# EAGLE board PowerboardRev4Con (EAGLE 8.6.0)
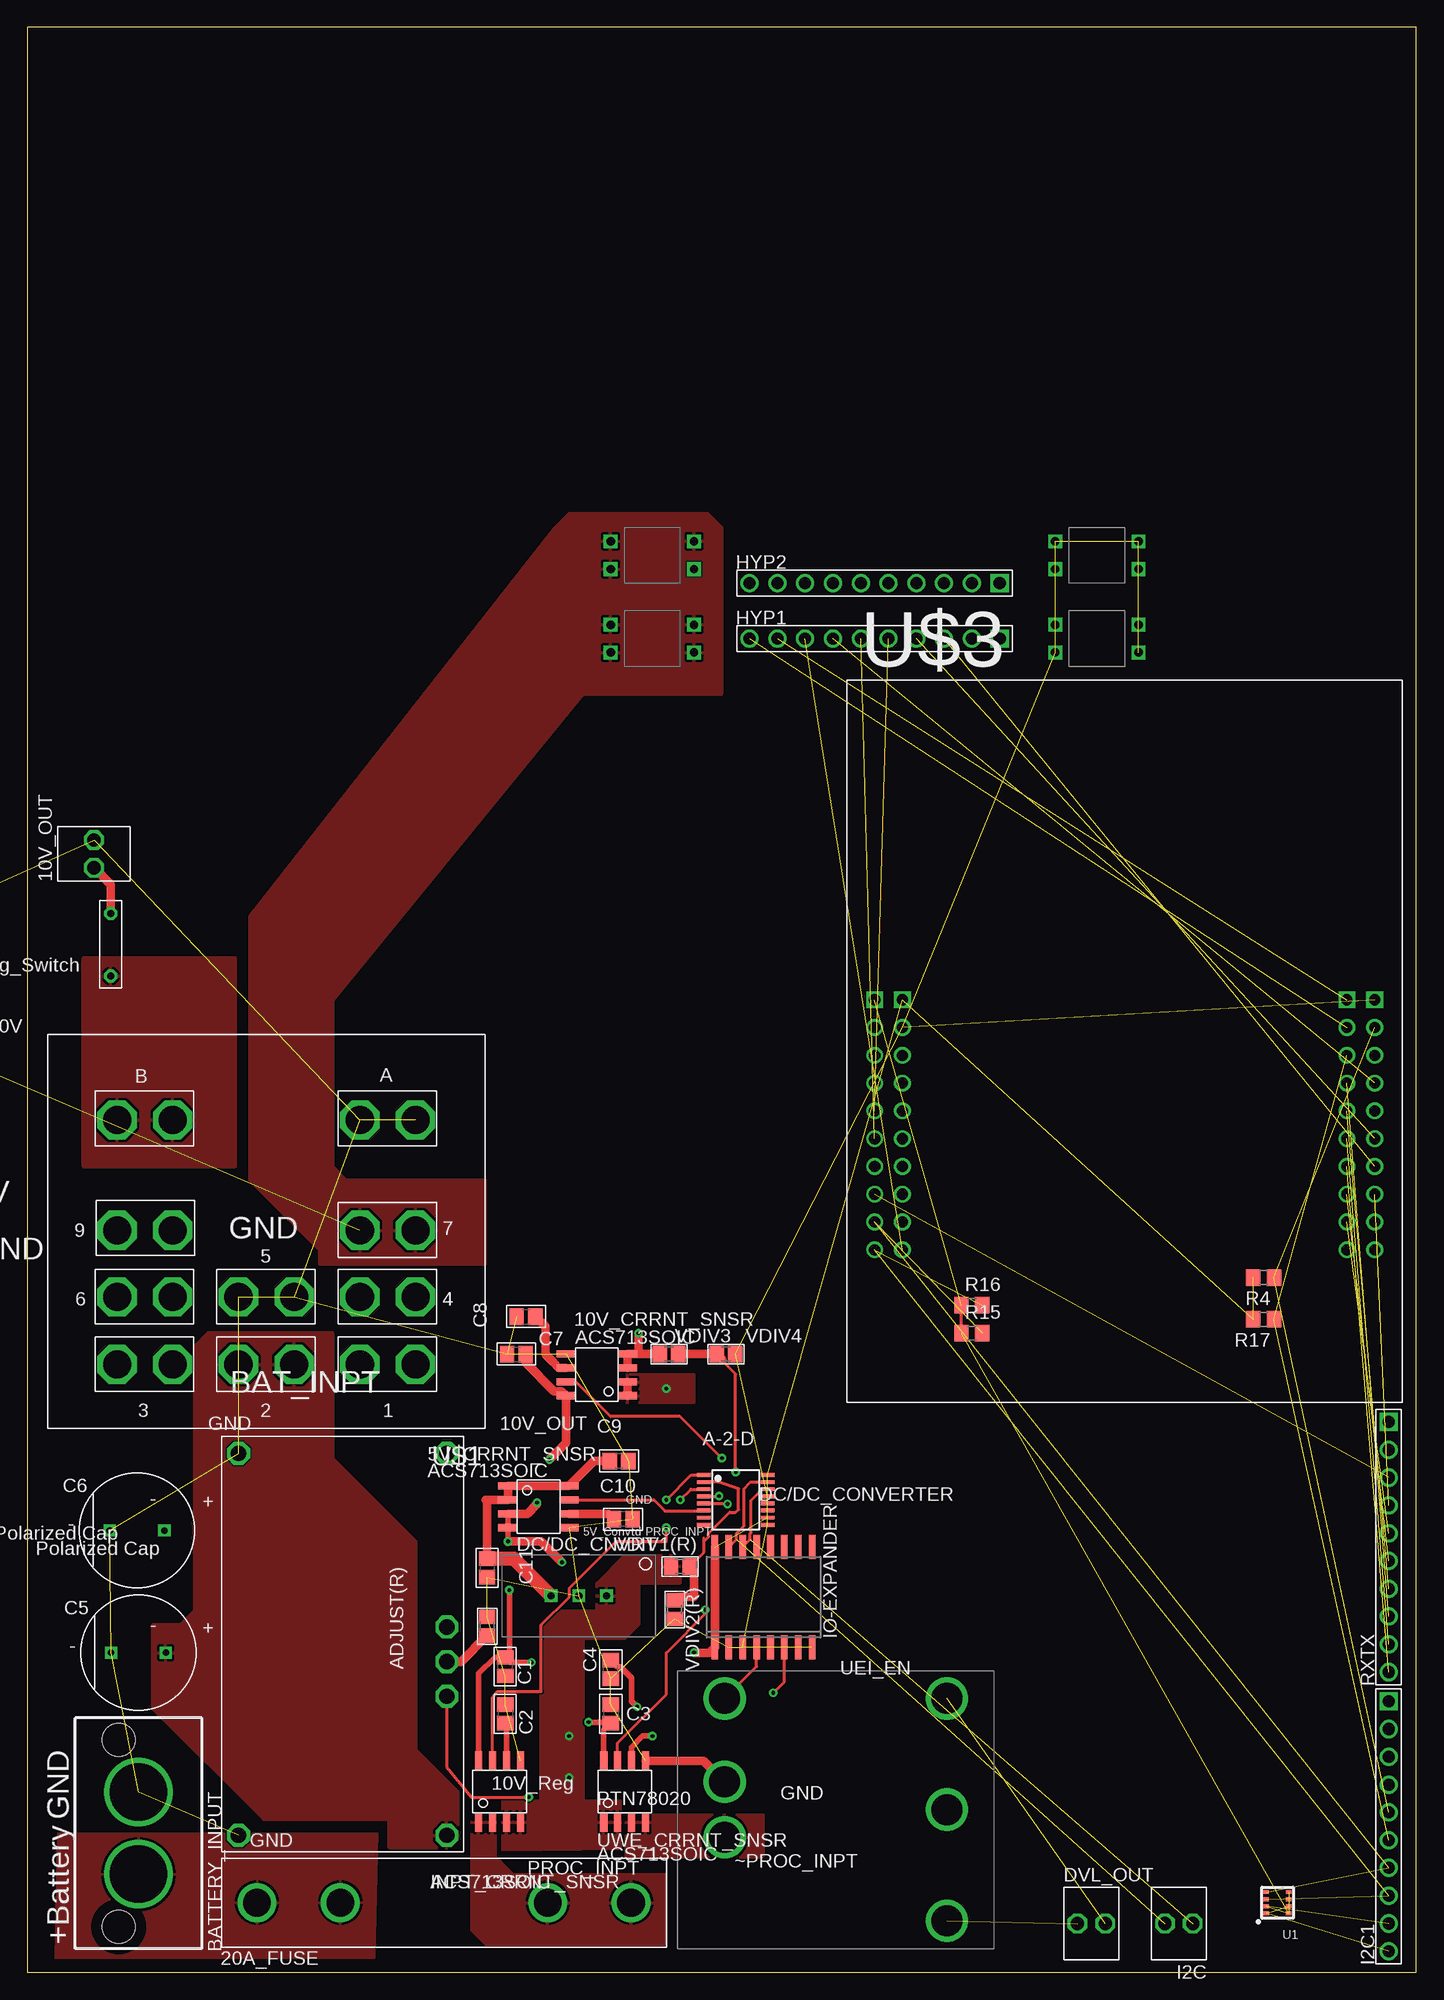
[diagram p0: board, top side]
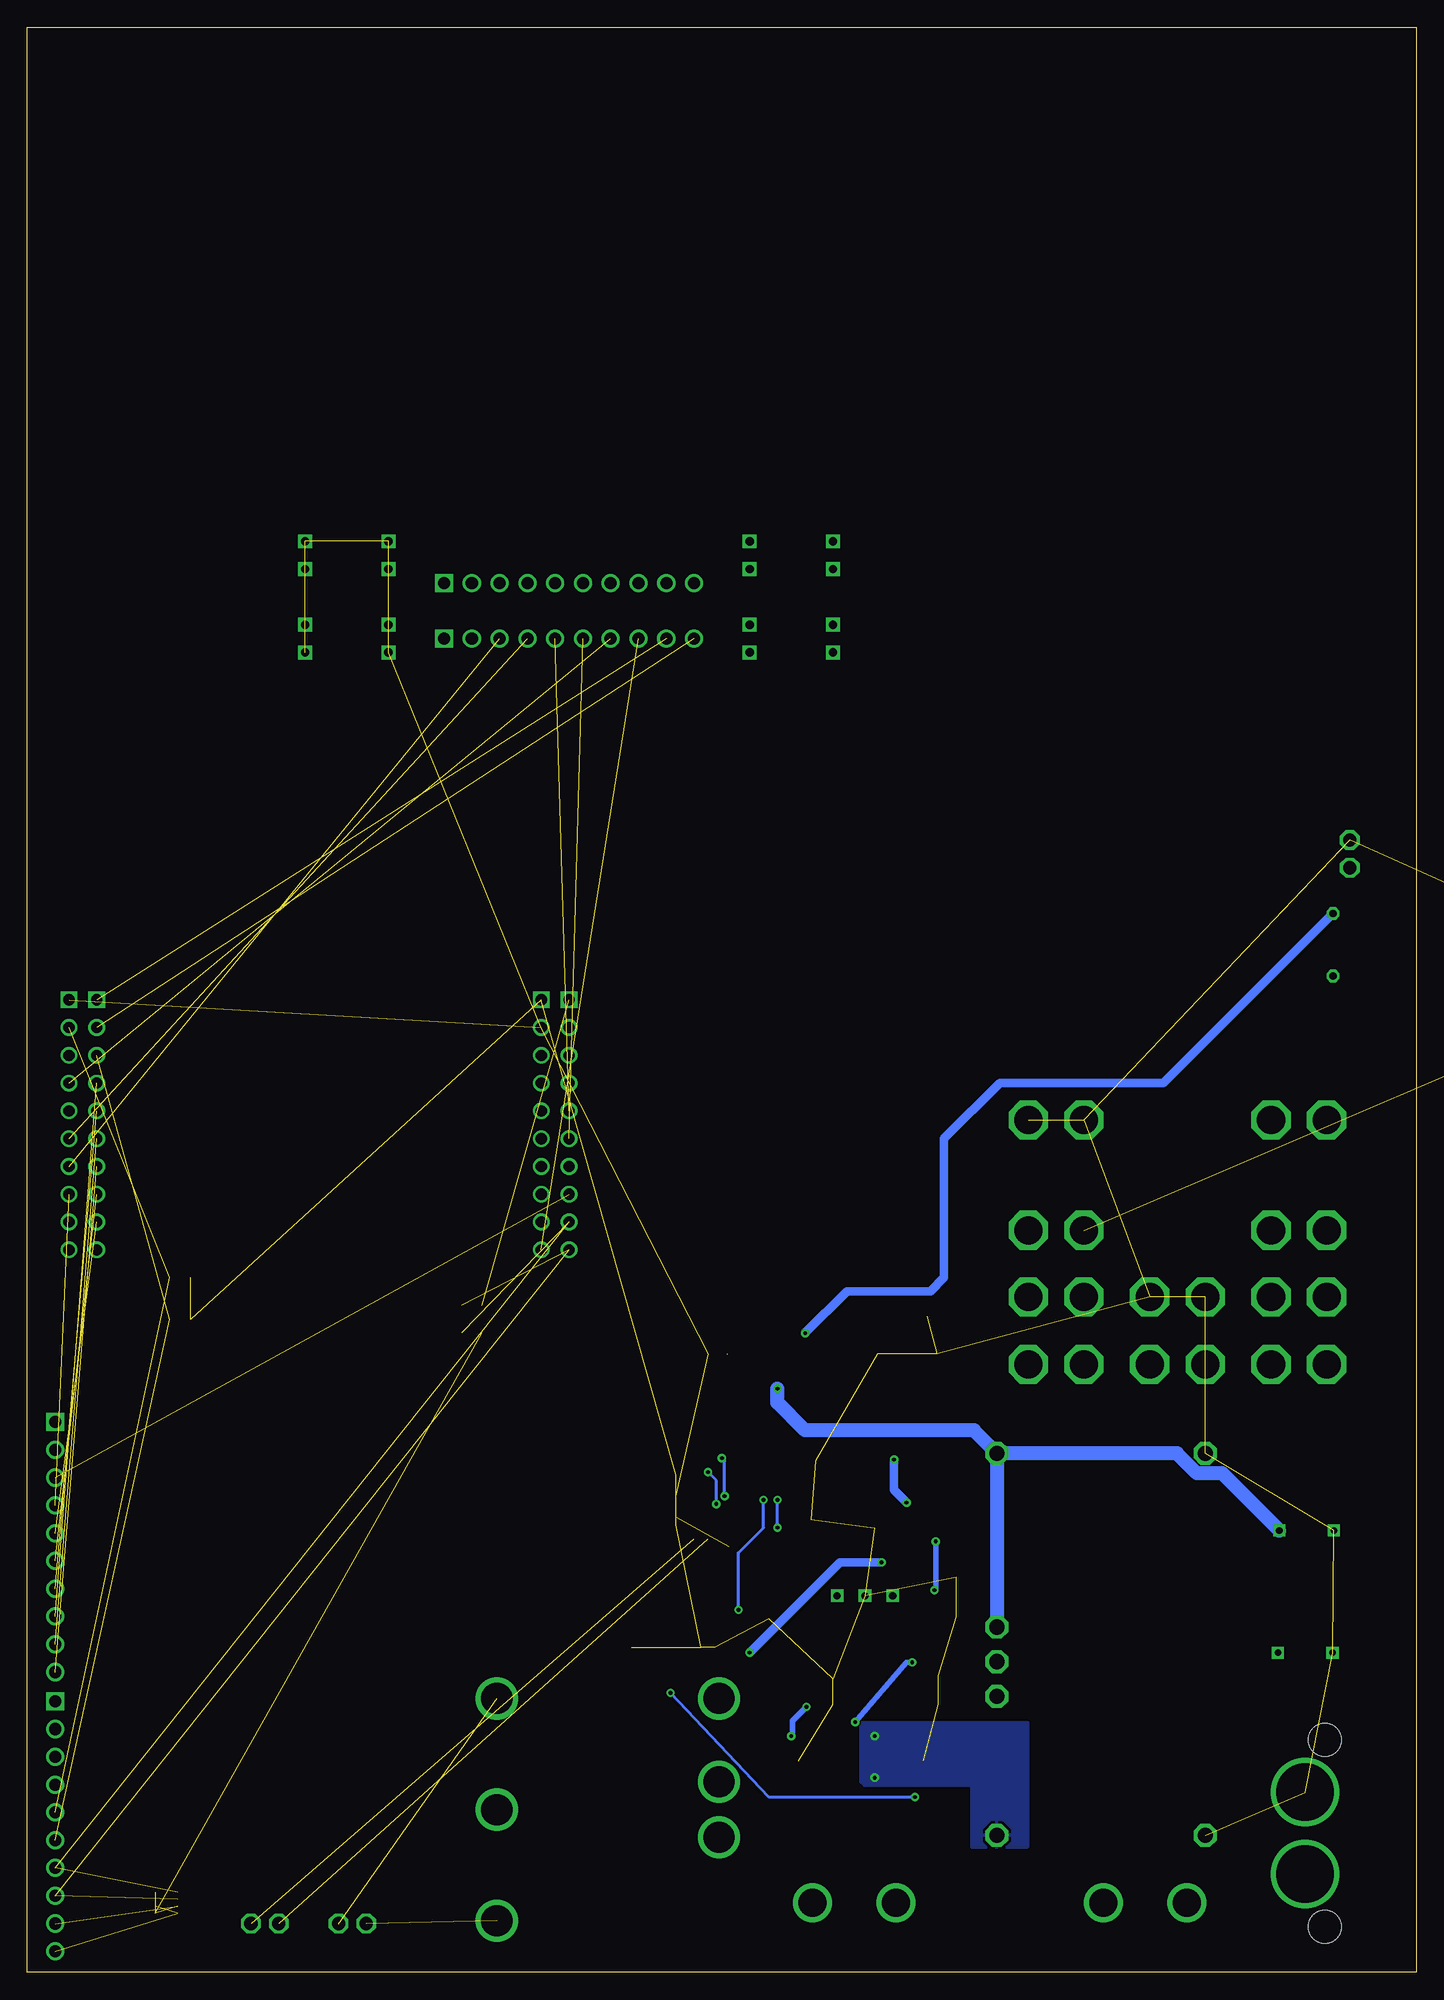
[diagram p1: board, bottom side, seen from below]

Size 127 x 177.8 mm. Coordinates in mm from the lower left corner, seen from the top.
Outline: 0,0 127,0 127,177.8 0,177.8 0,0
Copper layers (1*16): Top 0.035mm / dielectric 1.5mm / Bottom 0.035mm
Design rules "default": minimum track width 6mil, minimum drill 0.35mm, track to track 6mil, track to pad 6mil, pad to pad 6mil, via to via 6mil, smd to smd 6mil, copper to edge 40mil, drill to drill 6mil, minimum pad ring 10mil, minimum via ring 8mil, stop-mask expansion 4mil, vias tented up to drill 0mil, thermal gap 10mil

## Footprints (pad centres in the part's own frame; a part is rotated, then mirrored left to right if it is on the bottom)
ACS713-SOIC = smd 0.65 x 1.75: P$1 -1.905,-2.8; P$2 -0.635,-2.8; P$3 0.635,-2.8; P$4 1.905,-2.8; P$5 1.905,2.8; P$6 0.635,2.8; P$7 -0.635,2.8; P$8 -1.905,2.8
KK254_VERT_2PIN = drill 1.2 octagon: P$1 1.27,0; P$2 -1.27,0
PTN = drill 1.397 octagon: ADJUST -1.587,-9.525; GND1 -17.462,9.525; GND2 17.462,9.525; INHIBIT -4.763,-9.525; SENSE 1.587,-9.525; VIN -17.462,-9.525; VOUT 17.462,-9.525
1.25"_FUSECLIPS = drill 2.54: P$1 -17.107,0; P$2 -9.487,0; P$3 9.487,0; P$4 17.107,0
TSSOP16 = smd 0.35 x 1.2: 1 -2.275,-2.925; 2 -1.625,-2.925; 3 -0.975,-2.925; 4 -0.325,-2.925; 5 0.325,-2.925; 6 0.975,-2.925; 7 1.625,-2.925; 8 2.275,-2.925; 9 2.275,2.925; 10 1.625,2.925; 11 0.975,2.925; 12 0.325,2.925; 13 -0.325,2.925; 14 -0.975,2.925; 15 -1.625,2.925; 16 -2.275,2.925
R0805 = smd 1.3 x 1.5: 1 -0.85,0; 2 0.85,0
SUPERSABRE_2CIRCUIT = drill 5.25: P$1 -3.747,0; P$2 3.747,0 | hole 2.997: -8.534,-1.803; 8.534,-1.803
C0805 = smd 1.3 x 1.5: 1 -0.85,0; 2 0.85,0
PANASONIC_A_TYPE_M = drill 0.6 square: + 2.5,0; - -2.5,0
TSR2 = drill 0.65 square: 1 -2.54,0; 2 0,0; 3 2.54,0
UEI15 = drill 2.845: +VIN 10.16,2.54; +VOUT -10.16,10.16; -VIN 10.16,-2.54; -VOUT -10.16,-10.16; ON/OFFCNTRL 10.16,-10.16; OTPTTRIM -10.16,0
KK254_10-PIN = drill 1.1 square: P$1 11.43,0 | drill 1.1: P$2 8.89,0; P$3 6.35,0; P$4 3.81,0; P$5 1.27,0; P$6 -1.27,0; P$7 -3.81,0; P$8 -6.35,0; P$9 -8.89,0; P$10 -11.43,0
SO16W = smd 0.6 x 2.2: 1 -4.445,-4.6; 2 -3.175,-4.6; 3 -1.905,-4.6; 4 -0.635,-4.6; 5 0.635,-4.6; 6 1.905,-4.6; 7 3.175,-4.6; 8 4.445,-4.6; 9 4.445,4.6; 10 3.175,4.6; 11 1.905,4.6; 12 0.635,4.6; 13 -0.635,4.6; 14 -1.905,4.6; 15 -3.175,4.6; 16 -4.445,4.6
HE151TR-ND = drill 0.65 octagon: P$1 -2.81,0; P$2 2.905,0
R0805' = smd 1.3 x 1.5: 1 -0.95,0; 2 0.95,0
BME280_LGA = smd 0.5 x 0.35: P$1 1.025,0.975; P$2 1.025,0.325; P$3 1.025,-0.325; P$4 1.025,-0.975; P$5 -1.025,-0.975; P$6 -1.025,-0.325; P$7 -1.025,0.325; P$8 -1.025,0.975
KUHP_6.35MM-QUICK-CONNECT = drill 2.57 octagon: 1A -13.64,6.17; 1B -8.56,6.17; 2A -2.54,6.17; 2B 2.54,6.17; 3A 8.56,6.17; 3B 13.64,6.17; 4A -13.64,0; 4B -8.56,0; 5A -2.54,0; 5B 2.54,0; 6A 8.56,0; 6B 13.64,0; 7A -13.64,-6.1; 7B -8.56,-6.1; 9A 8.56,-6.1; 9B 13.64,-6.1; AA -13.64,-16.18; AB -8.56,-16.18; BA 8.56,-16.18; BB 13.64,-16.18
4-PIN-BIGPOWER = drill 0.762 square: P$1 -1.27,3.81; P$2 1.27,3.81; P$3 1.27,-3.81; P$4 -1.27,-3.81
TIVA-C_EVAL = drill 1.016 square: 1-1 -22.86,3.81; 2-1 22.86,3.81; 3-1 -20.32,3.81; 4-1 20.32,3.81 | drill 1.016: 1-2 -22.86,1.27; 1-3 -22.86,-1.27; 1-4 -22.86,-3.81; 1-5 -22.86,-6.35; 1-6 -22.86,-8.89; 1-7 -22.86,-11.43; 1-8 -22.86,-13.97; 1-9 -22.86,-16.51; 1-10 -22.86,-19.05; 2-2 22.86,1.27; 2-3 22.86,-1.27; 2-4 22.86,-3.81; 2-5 22.86,-6.35; 2-6 22.86,-8.89; 2-7 22.86,-11.43; 2-8 22.86,-13.97; 2-9 22.86,-16.51; 2-10 22.86,-19.05; 3-2 -20.32,1.27; 3-3 -20.32,-1.27; 3-4 -20.32,-3.81; 3-5 -20.32,-6.35; 3-6 -20.32,-8.89; 3-7 -20.32,-11.43; 3-8 -20.32,-13.97; 3-9 -20.32,-16.51; 3-10 -20.32,-19.05; 4-2 20.32,1.27; 4-3 20.32,-1.27; 4-4 20.32,-3.81; 4-5 20.32,-6.35; 4-6 20.32,-8.89; 4-7 20.32,-11.43; 4-8 20.32,-13.97; 4-9 20.32,-16.51; 4-10 20.32,-19.05

## Placement (x,y rotation side)
5V_CRRNT_SNSR  ACS713SOIC  [ACS713-SOIC]  46.74,42.55 270 top
10V_CRRNT_SNSR  ACS713SOIC  [ACS713-SOIC]  52.07,54.61 90 top
10V_OUT  KK254_VERT_2PIN""  [KK254_VERT_2PIN]  6.1,102.23 90 top
10V_REGULATOR  PTN78020  [PTN]  28.83,29.97 90 top
20A_FUSE  [1.25"_FUSECLIPS]  38.1,6.35 0 top
A-2-D  ADS7828  [TSSOP16]  64.77,43.18 270 top
ADJUST(R)  2.66k  [R0805]  42.04,31.62 90 top
BATTERY_INPUT  2_SUPERSABRE  [SUPERSABRE_2CIRCUIT]  10.16,12.7 270 top
BATTERY_OUT  2_SUPERSABRE  [SUPERSABRE_2CIRCUIT]  -22.86,92.2 180 top  (outside the outline)
C1  0.1u  [C0805]  43.69,27.94 90 top
C2  47n  [C0805]  43.69,23.62 270 top
C3  0.1u  [C0805]  53.34,23.62 270 top
C4  47n  [C0805]  53.34,27.69 90 top
C5  [PANASONIC_A_TYPE_M]  10.16,29.21 0 top
C6  [PANASONIC_A_TYPE_M]  10.03,40.39 0 top
C7  0.1u  [C0805]  44.7,56.52 0 top
C8  47n  [C0805]  45.59,59.94 0 top
C9  0.1u  [C0805]  54.1,46.74 180 top
C10  47n  [C0805]  54.48,41.4 180 top
C11  FILTER  [C0805]  42.04,36.96 270 top
DC/DC_CNVRT  TSR2-2450  [TSR2]  50.42,34.42 180 top
DC/DC_CONVERTER  UEI15  [UEI15]  73.91,14.86 180 top
DVL_OUT  KK254_VERT_2PIN""  [KK254_VERT_2PIN]  97.28,4.45 0 top
HYP1  KK254_10-PIN  [KK254_10-PIN]  77.47,121.92 0 top
HYP2  KK254_10-PIN  [KK254_10-PIN]  77.47,127 0 top
I2C  KK254_VERT_2PIN""  [KK254_VERT_2PIN]  105.28,4.45 180 top
I2C1  KK254_10-PIN  [KK254_10-PIN]  124.46,13.34 90 top
INPT_CRRNT_SNSR  ACS713SOIC  [ACS713-SOIC]  43.18,16.51 0 top
IO-EXPANDER  PCF8574T  [SO16W]  67.31,34.29 0 top
MAGREAD  HE151TR-ND  [HE151TR-ND]  7.62,93.98 270 top
R4  5k  [R0805']  113.03,63.5 180 top
R15  5k  [R0805']  86.36,58.42 0 top
R16  5k  [R0805']  86.36,60.96 0 top
R17  5k  [R0805']  113.03,59.69 180 top
RXTX  KK254_10-PIN  [KK254_10-PIN]  124.46,38.86 90 top
U1  BME280  [BME280_LGA]  114.3,6.35 180 top
U$1  KUHP-5XX1-XX  [KUHP_6.35MM-QUICK-CONNECT]  21.84,61.72 180 top
U$2  BCS-106-L-D-PE-BE  [4-PIN-BIGPOWER]  97.79,121.92 90 top
U$3  TIVA-C_EVAL  [TIVA-C_EVAL]  100.33,85.09 0 top
U$4  BCS-106-L-D-PE-BE  [4-PIN-BIGPOWER]  57.15,121.92 90 top
U$5  BCS-106-L-D-PE-BE  [4-PIN-BIGPOWER]  57.15,129.54 90 top
U$6  BCS-106-L-D-PE-BE  [4-PIN-BIGPOWER]  97.79,129.54 90 top
UWE_CRRNT_SNSR  ACS713SOIC  [ACS713-SOIC]  54.61,16.51 0 top
VDIV1(R)  90kO  [R0805]  59.69,37.08 0 top
VDIV2(R)  10kO  [R0805]  59.18,33.15 270 top
VDIV3  90kO  [R0805]  58.67,56.52 0 top
VDIV4  10kO  [R0805]  63.88,56.52 0 top

## Library data of the parts
5V_CRRNT_SNSR 10V_CRRNT_SNSR INPT_CRRNT_SNSR UWE_CRRNT_SNSR = allegro
10V_OUT BATTERY_INPUT BATTERY_OUT DVL_OUT HYP1 HYP2 I2C I2C1 RXTX = molex
10V_REGULATOR A-2-D U$3 = texas
20A_FUSE = littelfuse
ADJUST(R) C1-C11 R4 R15-R17 VDIV1(R) VDIV2(R) VDIV3 VDIV4 = resistor
DC/DC_CNVRT = tracoPower
DC/DC_CONVERTER = murata
IO-EXPANDER = texas; MPN: PCF8574T/3,512; OC_FARNELL: 1201255; OC_NEWARK: 70R6870
MAGREAD = magReed
U1 = BME280ComponentLibrary; PROD_ID: IC-13090
U$1 = TE
U$2 U$4-U$6 = samtec

## Nets
3.3V: I2C1.P$9 R15.1 R16.1 U1.P$2 U1.P$5 U1.P$6 U1.P$8 U$3.1-1
5V: 5V_CRRNT_SNSR.P$3 5V_CRRNT_SNSR.P$4 10V_CRRNT_SNSR.P$8 A-2-D.10 A-2-D.16 C1.2 C3.2 C7.2 INPT_CRRNT_SNSR.P$8 IO-EXPANDER.1 IO-EXPANDER.16 R4.2 R17.2 U$3.3-1 UWE_CRRNT_SNSR.P$8
5V_CNVTD: 5V_CRRNT_SNSR.P$1 5V_CRRNT_SNSR.P$2 5V_CRRNT_SNSR.P$8 C9.2 C11.1 DC/DC_CNVRT.3
5V_CURRENT: 5V_CRRNT_SNSR.P$7 A-2-D.6
5V_FILT: 5V_CRRNT_SNSR.P$6 C10.2
10V_CURRENT: 10V_CRRNT_SNSR.P$7 A-2-D.4
10V_EN: 10V_REGULATOR.INHIBIT IO-EXPANDER.6
10V_OUT: 10V_CRRNT_SNSR.P$1 10V_CRRNT_SNSR.P$2 10V_REGULATOR.SENSE 10V_REGULATOR.VOUT C6.+
10V_VOLTAGE: A-2-D.5 VDIV3.2 VDIV4.1
+VIN: DC/DC_CONVERTER.+VIN UWE_CRRNT_SNSR.P$3 UWE_CRRNT_SNSR.P$4
BATTERY_LINE: BATTERY_OUT.P$2 U$1.7A U$1.7B U$4.P$1 U$4.P$2 U$4.P$3 U$4.P$4 U$5.P$1 U$5.P$2 U$5.P$3
CS_0: U$3.2-9
CS_2: U$3.1-2
DGND: I2C1.P$10 U1.P$1 U1.P$7
FILTER: C4.2 UWE_CRRNT_SNSR.P$6
FLTR_10V: 10V_CRRNT_SNSR.P$6 C8.2
GND: 5V_CRRNT_SNSR.P$5 10V_CRRNT_SNSR.P$5 10V_OUT.P$1 10V_REGULATOR.GND1 10V_REGULATOR.GND2 A-2-D.9 A-2-D.12 A-2-D.13 ADJUST(R).2 BATTERY_INPUT.P$1 BATTERY_OUT.P$1 C1.1 C2.1 C3.1 C4.1 C5.- C6.- C7.1 C8.1 C9.1 C10.1 C11.2 DC/DC_CNVRT.2 DC/DC_CONVERTER.-VIN INPT_CRRNT_SNSR.P$5 IO-EXPANDER.2 IO-EXPANDER.3 IO-EXPANDER.8 U$1.5A U$1.5B U$1.AA U$1.AB U$2.P$1 U$2.P$2 U$2.P$3 U$2.P$4 U$3.2-1 U$3.3-2 U$6.P$1 U$6.P$2 U$6.P$3 U$6.P$4 UWE_CRRNT_SNSR.P$5 VDIV2(R).2 VDIV4.2
INPT_FILT: C2.2 INPT_CRRNT_SNSR.P$6
INPUT_CURRENT: A-2-D.1 INPT_CRRNT_SNSR.P$7
INPUT_VOLTAGE: A-2-D.2 VDIV1(R).2 VDIV2(R).1
MISO_0: RXTX.P$4 U$3.2-8
MISO_3: U$3.3-5
MOSI_0: RXTX.P$3 U$3.1-8
MOSI_3: U$3.3-6
N$5: 10V_REGULATOR.ADJUST ADJUST(R).1
PE2: U$3.3-8
PE3: U$3.3-9
PROC_INPUT: 10V_REGULATOR.VIN C5.+ DC/DC_CNVRT.1 INPT_CRRNT_SNSR.P$3 INPT_CRRNT_SNSR.P$4 U$1.2A U$1.2B UWE_CRRNT_SNSR.P$1 UWE_CRRNT_SNSR.P$2 VDIV1(R).1
PROCESSED_10V_OUT: 10V_CRRNT_SNSR.P$3 10V_CRRNT_SNSR.P$4 10V_OUT.P$2 MAGREAD.P$1 VDIV3.1
PROCESSED_UEI_OUTPUT: DC/DC_CONVERTER.+VOUT DVL_OUT.P$2
PUSH1: U$3.4-10
PWM0: HYP1.P$3 U$3.2-7
PWM1: HYP1.P$4 U$3.2-6
PWM2: HYP1.P$5 U$3.1-5
PWM3: HYP1.P$6 U$3.1-6
PWM4: HYP1.P$7 U$3.2-4
PWM5: HYP1.P$8 U$3.3-10
PWM6: HYP1.P$9 U$3.4-1
PWM7: HYP1.P$10 U$3.4-2
RES: U$3.2-5
RLY_10V: MAGREAD.P$2 U$1.BA U$1.BB
RX_CF: U$3.2-3
RX_MC: RXTX.P$8 U$3.4-4
RX_MD: RXTX.P$6 U$3.4-8
RX_MF: U$3.1-3
RX_SF: RXTX.P$9 U$3.4-6
SCK_0: U$3.2-10
SCL: A-2-D.14 I2C.P$2 IO-EXPANDER.14
SCL_0: I2C1.P$5 R4.1 U$3.2-2
SCL_1: I2C1.P$7 R15.2 U1.P$4 U$3.1-9
SDA: A-2-D.15 I2C.P$1 IO-EXPANDER.15
SDA_0: I2C1.P$6 R17.1 U$3.4-3
SDA_1: I2C1.P$8 R16.2 U1.P$3 U$3.1-10
SPI_CLK_2: U$3.1-7
TX_CF: U$3.3-7
TX_MC: RXTX.P$7 U$3.4-5
TX_MD: RXTX.P$5 U$3.4-9
TX_MF: U$3.1-4
TX_SF: RXTX.P$10 U$3.4-7
UEI_EN: DC/DC_CONVERTER.ON/OFFCNTRL IO-EXPANDER.4
UEI_GND: DC/DC_CONVERTER.-VOUT DVL_OUT.P$1
UWE_CURRENT: A-2-D.3 UWE_CRRNT_SNSR.P$7
VBAT: 20A_FUSE.P$1 20A_FUSE.P$2 BATTERY_INPUT.P$2
VBAT_P: 20A_FUSE.P$3 20A_FUSE.P$4 INPT_CRRNT_SNSR.P$1 INPT_CRRNT_SNSR.P$2

## Tracks (layer width: path | path; a pad name or v marks a point on that pad's centre or on a via)
3.3V  (6 unrouted)
  Top 0.254: R15.1 R16.1
5V  (via drill 0.35)  (5 unrouted)
  Top 0.508: UWE_CRRNT_SNSR.P$8 52.7,22.14 C3.2 53.25,22.86 v51.31,22.86 | INPT_CRRNT_SNSR.P$8 41.27,27.3 42.76,28.79 C1.2 | 5V_CRRNT_SNSR.P$3 5V_CRRNT_SNSR.P$4 v43.94,39.38 v43.94,39.37 | v44.07,34.92 44.07,29.17 C1.2 | v46.1,28.32 44.16,28.32 C1.2
  Top 0.762: v43.94,39.37 46.99,39.37 v48.9,37.47 | v60.96,29.21 62.38,29.21 IO-EXPANDER.1 62.87,32.72 62.89,32.75 62.89,38.37 62.87,38.4 IO-EXPANDER.16 | 5V_CRRNT_SNSR.P$3 45.72,41.91 46.61,42.8 v46.61,42.93 | v47.75,46.86 49.27,48.38 10V_CRRNT_SNSR.P$8 48.86,53.12 48.17,53.12 45.55,55.74 C7.2
  Bottom 0.508: v43.94,39.37 43.94,35.05 v44.07,34.92 | v51.31,22.86 46.61,28.32 v46.1,28.32
  Bottom 0.762: v48.9,37.47 52.7,37.47 v60.96,29.21 | v46.61,42.93 47.75,44.07 v47.75,46.86
5V_CNVTD
  Top 0.762: C11.1 42.04,43.05 41.91,43.18 5V_CRRNT_SNSR.P$2 5V_CRRNT_SNSR.P$1 5V_CRRNT_SNSR.P$8 51.82,46.74 C9.2
  Top 1.27: DC/DC_CNVRT.3 44.49,37.81 C11.1
5V_CURRENT
  Top 0.254: 5V_CRRNT_SNSR.P$7 57.28,43.18 58.29,42.16 61.8,42.16 A-2-D.6
5V_FILT
  Top 0.762: 5V_CRRNT_SNSR.P$6 53.12,41.91 C10.2
10V_CURRENT  (via drill 0.35)
  Top 0.254: A-2-D.4 61.85,43.51 v63.25,43.51 | v63.5,46.99 59.69,50.8 53.34,50.8 50.16,53.98 10V_CRRNT_SNSR.P$7
  Bottom 0.254: v63.25,43.51 63.25,46.74 v63.5,46.99
10V_EN  (via drill 0.35)
  Top 0.254: 10V_REGULATOR.INHIBIT 38.35,18.8 40.64,16 v45.85,16 | v68.2,25.53 69.22,26.54 IO-EXPANDER.6
  Bottom 0.254: v45.85,16 59.18,16 v68.2,25.53
10V_OUT  (via drill 0.35)
  Top 0.762: 10V_CRRNT_SNSR.P$1 10V_CRRNT_SNSR.P$2
  Bottom 1.27: C6.+ 17.75,45.6 20.06,45.6 21.9,47.43 10V_REGULATOR.VOUT | 10V_REGULATOR.VOUT 10V_REGULATOR.SENSE | 10V_REGULATOR.VOUT 40.45,49.53 55.88,49.53 58.42,52.07 v58.42,53.34
  pour Top: 59.69,54.61 54.61,54.61 54.61,52.07 60.96,52.07 60.96,54.61
10V_VOLTAGE  (via drill 0.35)  (1 unrouted)
  Top 0.254: A-2-D.5 63.83,42.85 63.88,42.8 v64.01,42.8 | VDIV4.1 63.8,55.74 63.8,55.65 64.77,54.68 v64.77,45.72
  Top 0.762: VDIV3.2 60.96,56.52 | 60.96,56.52 63,56.52 63.55,55.96 | 60.96,56.52
  Bottom 0.254: v64.01,42.8 64.01,44.96 v64.77,45.72
+VIN
  pour Top: 54.74,13.97 54.74,10.54 67.18,10.54 67.31,10.67 67.31,14.35 55.12,14.35
BATTERY_LINE  (1 unrouted)
  pour Top: 41.91,72.39 29.21,72.39 27.94,73.66 27.94,88.9 50.8,116.84 63.5,116.84 63.5,132.08 62.23,133.35 49.53,133.35 48.26,132.08 20.32,96.52 20.32,72.39 26.67,66.04 26.67,64.77 41.91,64.77
DGND  (2 unrouted)
FILTER  (via drill 0.35)
  Top 0.508: C4.2 53.98,27.89 54.26,27.89 55.24,26.91 55.24,24.77 v55.75,24.26 | v57.15,21.59 56.26,21.59 55.24,20.57 UWE_CRRNT_SNSR.P$6
  Bottom 0.508: v55.75,24.26 57.02,22.99 57.02,21.59 v57.15,21.59
FLTR_10V
  Top 0.762: C8.2 47.37,59.02 47.37,56.46 48.1,55.73 48.59,55.24 10V_CRRNT_SNSR.P$6
GND  (43 unrouted)
  Top 0.762: UWE_CRRNT_SNSR.P$5 61.84,19.31 DC/DC_CONVERTER.-VIN
INPT_FILT
  Top 0.508: INPT_CRRNT_SNSR.P$6 43.81,22.64 C2.2
INPUT_CURRENT  (via drill 0.35)
  Top 0.254: INPT_CRRNT_SNSR.P$7 42.55,25.12 42.95,25.66 44.32,25.66 46.99,25.65 46.99,31.75 49.56,34.32 49.56,35.11 53.82,39.37 58.42,39.37 v58.42,40.64 | v58.42,43.18 60.7,45.45 A-2-D.1
  Bottom 0.254: v58.42,40.64 v58.42,43.18
INPUT_VOLTAGE
  Top 0.254: VDIV1(R).2 61.85,38.39 61.85,39.37 | 61.85,39.37 61.85,39.67 | A-2-D.2 63.15,44.8 65.02,44.2 65.02,42.29 64.77,42.04 64.22,42.04 62.29,40.11 62.29,39.81 61.85,39.37
  Top 0.762: VDIV2(R).1 59.48,34.29 60.96,34.29 60.96,36.66 VDIV1(R).2
MISO_0  (1 unrouted)
MOSI_0  (1 unrouted)
N$5
  Top 0.762: 10V_REGULATOR.ADJUST 39.65,28.38 ADJUST(R).1
PROC_INPUT  (via drill 0.35)
  other vias: 49.53,21.59 49.53,17.78
  pour Top: 46.99,11.43 46.99,33.02 52.07,33.02 52.07,35.56 55.88,35.56 55.88,31.75 54.61,30.48 50.8,30.48 50.8,12.7
  pour Top: 52.07,35.56 54.61,38.1 59.69,38.1 59.69,35.56 55.88,35.56 55.88,34.29 54.61,33.02 52.07,33.02
  pour Top: 43.43,15.62 43.43,11.18 54.23,11.3 54.23,15.62
  pour Bottom: 50.8,22.86 35.56,22.86 35.56,11.43 40.64,11.43 40.64,17.02 50.42,17.02 50.8,17.4
  pour Top: 33.02,11.43 39.37,11.43 39.37,16.51 35.56,20.32 35.56,39.37 27.94,46.99 27.94,58.42 16.51,58.42 15.24,57.15 15.24,33.02 13.97,31.75 11.43,31.75 11.43,24.13 21.59,13.97 33.02,13.97
PROCESSED_10V_OUT  (via drill 0.35)
  Top 0.762: 10V_CRRNT_SNSR.P$3 10V_CRRNT_SNSR.P$4 55.88,56.52 | 55.88,56.52 VDIV3.1 | 10V_OUT.P$2 7.62,99.44 MAGREAD.P$1 | v55.88,58.42 55.88,56.52
  Bottom 0.762: MAGREAD.P$1 23.13,81.28 38.1,81.28 43.18,76.2 43.18,63.5 44.45,62.23 52.07,62.23 v55.88,58.42
PROCESSED_UEI_OUTPUT  (1 unrouted)
PWM0  (1 unrouted)
PWM1  (1 unrouted)
PWM2  (1 unrouted)
PWM3  (1 unrouted)
PWM4  (1 unrouted)
PWM5  (1 unrouted)
PWM6  (1 unrouted)
PWM7  (1 unrouted)
RLY_10V
  pour Top: 5.08,91.44 5.08,73.66 19.05,73.66 19.05,92.71 5.08,92.71
RX_MC  (1 unrouted)
RX_MD  (1 unrouted)
RX_SF  (1 unrouted)
SCL  (1 unrouted)
  Top 0.254: IO-EXPANDER.14 66.1,39.58 66.1,40.11 66.17,40.18 66.17,43.15 67.17,44.16 A-2-D.14
SCL_0  (2 unrouted)
SCL_1  (3 unrouted)
SDA  (1 unrouted)
  Top 0.254: IO-EXPANDER.15 64.83,39.58 64.83,40.11 65.53,40.81 65.53,44.2 66.14,44.8 A-2-D.15
SDA_0  (2 unrouted)
SDA_1  (3 unrouted)
TX_MC  (1 unrouted)
TX_MD  (1 unrouted)
TX_SF  (1 unrouted)
UEI_EN
  Top 0.254: DC/DC_CONVERTER.ON/OFFCNTRL 66.67,27.94 IO-EXPANDER.4
UEI_GND  (1 unrouted)
UWE_CURRENT  (via drill 0.35)
  Top 0.254: UWE_CRRNT_SNSR.P$7 53.98,20.95 58.42,25.4 58.42,29.21 62.23,33.02 62.13,33.12 v61.98,33.12 | v59.69,43.18 60.66,44.16 A-2-D.3
  Bottom 0.254: v61.98,33.12 61.98,38.35 59.69,40.64 v59.69,43.18
VBAT
  pour Top: 2.79,12.7 32,12.7 31.75,1.27 2.54,1.27
VBAT_P
  pour Top: 40.64,13.97 40.64,3.81 41.91,2.54 58.42,2.54 58.42,8.89 44.45,8.89 42.8,10.54 42.8,13.84 42.67,13.97

## Text on the board
tPlace: Mag_Switch | +10V | BAT_OUT | +5V | 10V | GND | GND | BAT_INPT | GND | 10V_OUT | - | GND | + | 5V_Convtd | PROC_INPT | Polarized Cap | Polarized Cap | - | + | UEI_EN | 10V_Reg | GND | PTN78020 | GND | GND | ~PROC_INPT | PROC_INPT | +Battery